# Altium PCB UROV_ESC_Mounts.PcbDoc
Units mm, origin at the board's own origin, x right, y up, seen from the top; angles counter-clockwise.
Board outline 99 x 99 mm, 2 copper layers (Top Layer, Bottom Layer); 24 components, 40 nets, 84 pads, 0 vias.
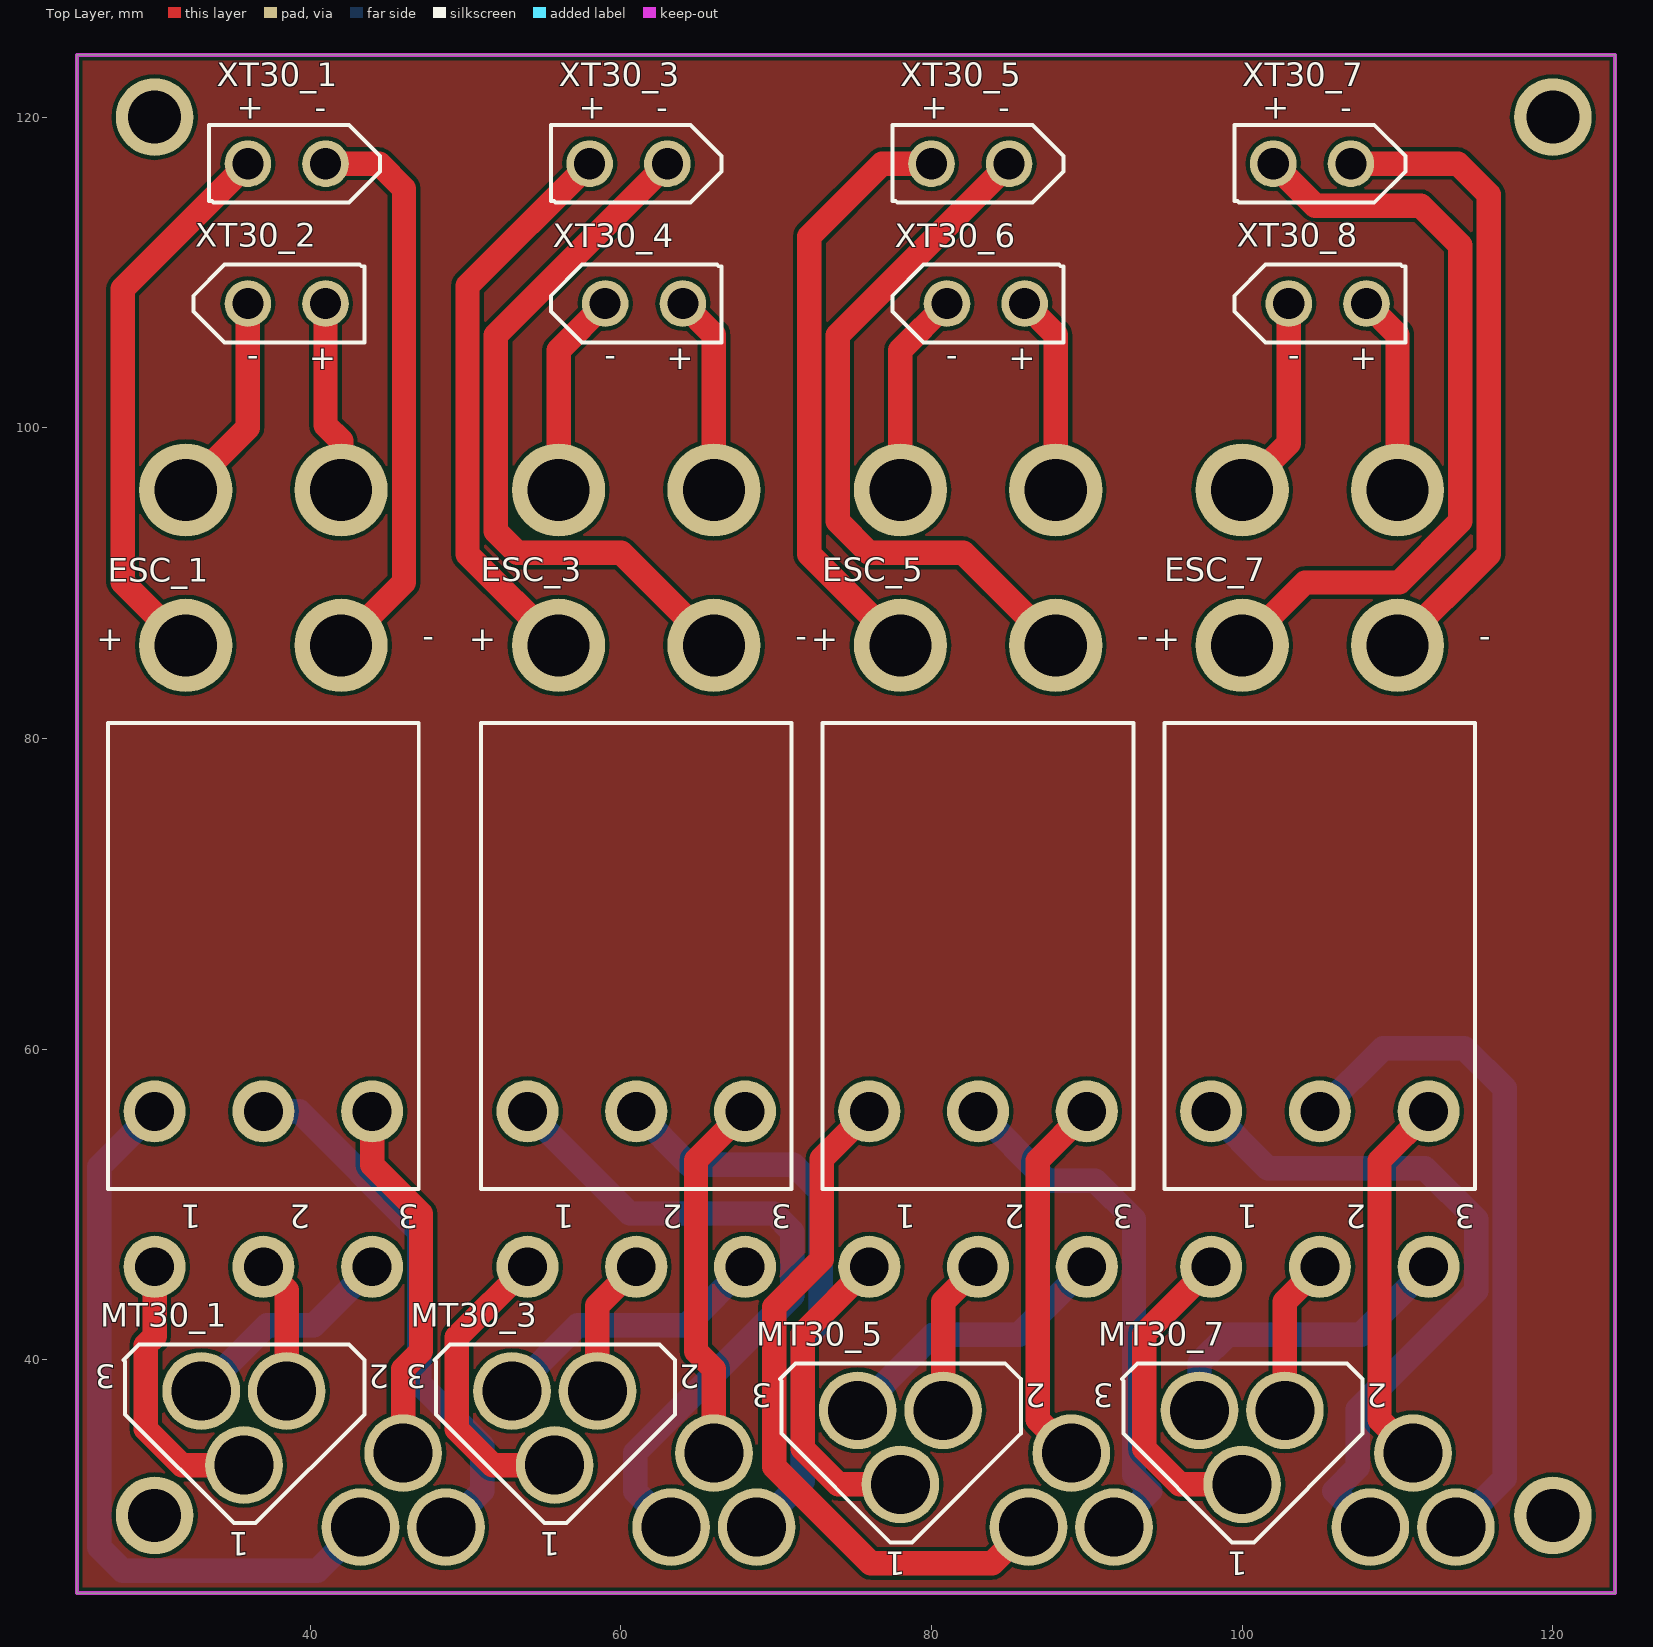
[diagram p0: Top Layer view]
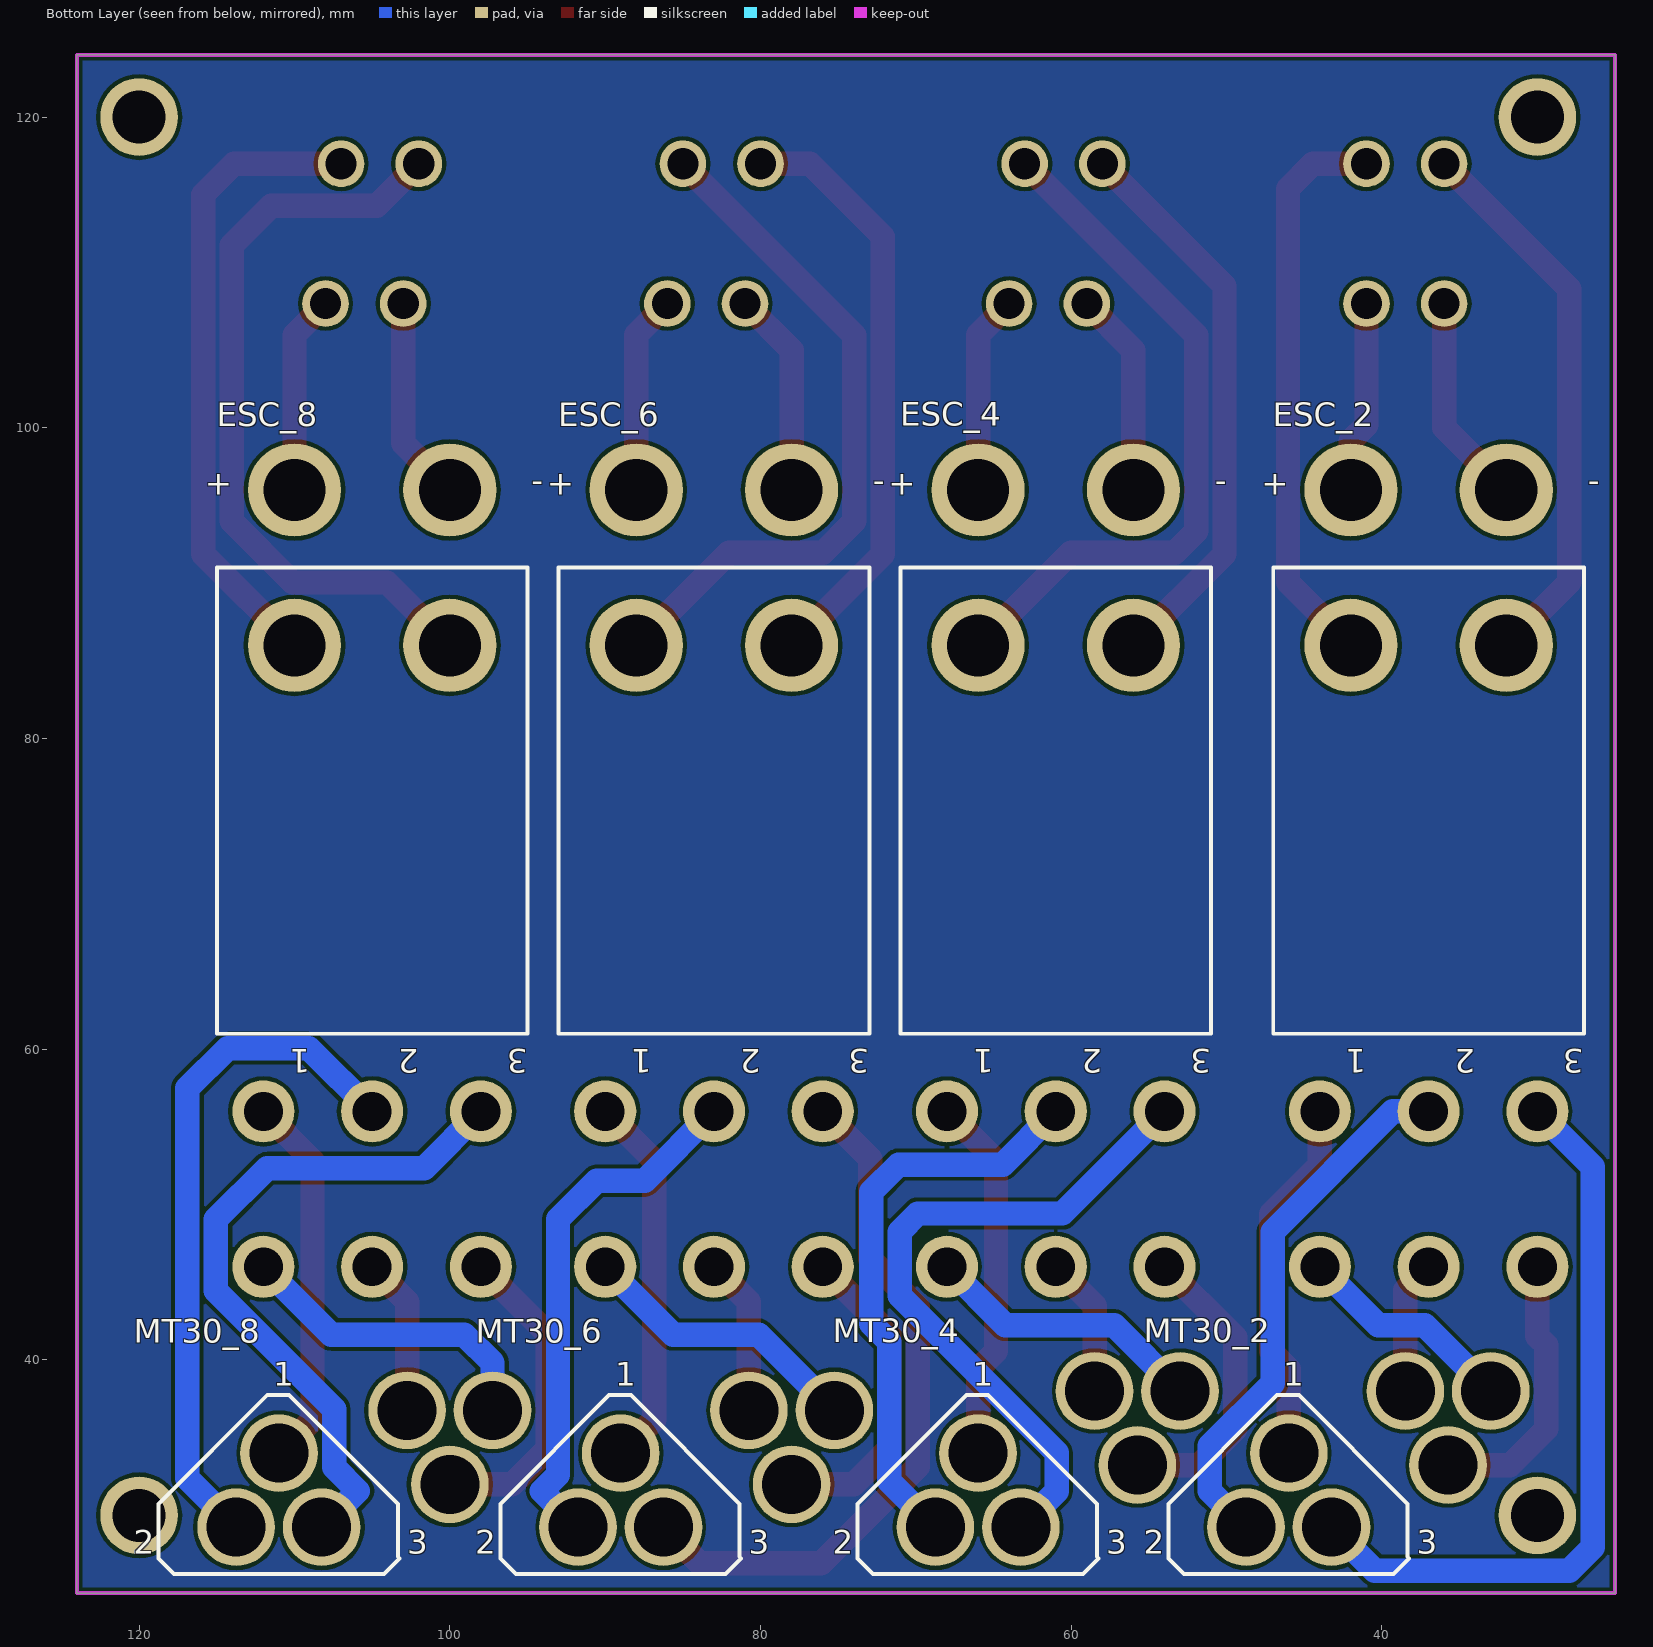
[diagram p1: Bottom Layer view, seen from below]

## Layer stack, top to bottom
Top Solder: solder mask 0.0102, Solder Resist, Dk 3.5
Top Layer: signal copper 0.0356
Dielectric 1: dielectric 0.32, FR-4, Dk 4.8
Bottom Layer: signal copper 0.0356
Bottom Solder: solder mask 0.0102, Solder Resist, Dk 3.5

## Board outline
124,25 124,124 25,124 25,25

## Design rules (kind name [scope] priority, off if disabled: settings)
Clearance [All] p1: gap=0.254 ignorepadtopadclearanceinfootprint=FALSE except(0: Arc-Hole Track-Hole SMDPad-Hole THPad-Hole Via-Hole Fill-Hole Poly-Hole Region-Hole Text-Hole)
PolygonConnect [All] p1: connectstyle=Relief reliefconductorwidth=0.254 reliefentries=4 polygonreliefangle="90 Angle" airgapwidth=0.254
RoomDefinition UROV_ESC_Mounts [InComponentClass('UROV_ESC_Mounts')] p1: confinementstyle=ConfineIn formatcopy=TRUE lockcomponents=FALSE outline 25,25 124,25 124,124 25,124
RoutingVias [All] p1: holewidth=0.711 width=1.27 viastyle="Through Hole" minholewidth=0.711 minwidth=1.27 maxholewidth=0.711 maxwidth=1.27
SolderMaskExpansion [All] p1: expansion=0.102
Width [All] p1: maxlimit=3 minlimit=1 preferedwidth=1.57
30 further rules are at their usual default settings.

## Components (designator, comment, footprint, x,y, rotation, side; value= is the part's Value field where it differs from the comment)
ESC_1 "ESC_Template" ESC_mounts 47,81 r180 top
ESC_2 "ESC_Template" ESC_mounts 27,91 r0 bottom
ESC_3 "ESC_Template" ESC_mounts 71,81 r180 top
ESC_4 "ESC_Template" ESC_mounts 51,91 r0 bottom
ESC_5 "ESC_Template" ESC_mounts 93,81 r180 top
ESC_6 "ESC_Template" ESC_mounts 73,91 r0 bottom
ESC_7 "ESC_Template" ESC_mounts 115,81 r180 top
ESC_8 "ESC_Template" ESC_mounts 95,91 r0 bottom
MT30_1 "MT60_3pin" MT60_3pin 38.5,38 r180 top
MT30_2 "MT60_3pin" MT60_3pin 48.75,29.237 r180 bottom
MT30_3 "MT60_3pin" MT60_3pin 58.5,38 r180 top
MT30_4 "MT60_3pin" MT60_3pin 68.75,29.237 r180 bottom
MT30_5 "MT60_3pin" MT60_3pin 80.75,36.763 r180 top
MT30_6 "MT60_3pin" MT60_3pin 91.75,29.237 r180 bottom
MT30_7 "MT60_3pin" MT60_3pin 102.75,36.763 r180 top
MT30_8 "MT60_3pin" MT60_3pin 113.75,29.237 r180 bottom
XT30_1 "XT30_2pin" XT30_2pin 36,117 r0 top
XT30_2 "XT30_2pin" XT30_2pin 41,108 r180 top
XT30_3 "XT30_2pin" XT30_2pin 58,117 r0 top
XT30_4 "XT30_2pin" XT30_2pin 64,108 r180 top
XT30_5 "XT30_2pin" XT30_2pin 80,117 r0 top
XT30_6 "XT30_2pin" XT30_2pin 86,108 r180 top
XT30_7 "XT30_2pin" XT30_2pin 102,117 r0 top
XT30_8 "XT30_2pin" XT30_2pin 108,108 r180 top

## Footprints (in the part's own frame and the unit in brackets; to place one, negate y for a bottom-side part, rotate by r counter-clockwise, add the part's x,y. Pads: shape width x height; smd on the part's side, far side on the other; paste and mask are expansions set on the pad)
ESC_mounts [mm]
  round 6 hole 4: 1(5,-5) 2(15,-5)
  round 4 hole 2.5: 3(3,35) 4(10,35) 5(17,35)
  silkscreen extent 0,0 20,30
MT60_3pin [mm]
  round 5 hole 3.8: 1(2.75,4.763) 2(0,0) 3(5.5,0)
  silkscreen extent -5,-3 10.5,8.5
XT30_2pin [mm]
  round 3 hole 2: +(0,0) -(5,0)
  silkscreen extent -2.5,-2.5 8.5,2.5

## Free pads (board coordinates)
  round 5 hole 3.4: 48(30,30) 48(30,120) 48(120,30) 48(120,120)

## Nets (pads, with @x,y where several pads share a name; then routed paths per layer and width w, separated by ;. In a path a pad name is that pad's centre, name@x,y a point inside that pad or via, vN(x,y) a via of type N, cw(c..) or ccw(c..) an arc to the next point about the centre after c; other vN are vias at no path point)
NetESC_1_1: ESC_1.1 XT30_1.- | length 36.8
  Top Layer w1.57: XT30_1.- 44.446,117 46.05,115.395 46.05,90.05 ESC_1.1
NetESC_1_2: ESC_1.2 XT30_1.+ | length 36
  Top Layer w1.57: ESC_1.2 27.94,90.06 27.94,108.94 XT30_1.+
NetESC_1_3: ESC_1.3 MT30_1.3 | length 14.3
  Bottom Layer w1.57: MT30_1.3 37.24,42.24 40.24,42.24 ESC_1.3
NetESC_1_4: ESC_1.4 MT30_1.2 | length 8.6
  Top Layer w1.57: ESC_1.4 38.5,44.5 MT30_1.2
NetESC_1_5: ESC_1.5 MT30_1.1 | length 17.9
  Top Layer w1.57: ESC_1.5 30,41.529 29.439,40.968 29.439,35.56 31.762,33.237 MT30_1.1
NetESC_2_1: ESC_2.1 XT30_2.- | length 13.7
  Top Layer w1.57: ESC_2.1 36,100 XT30_2.-
NetESC_2_2: ESC_2.2 XT30_2.+ | length 12.4
  Top Layer w1.57: XT30_2.+ 41,100.166 42,99.166 ESC_2.2
NetESC_2_3: ESC_2.3 MT30_2.3 | length 48.1
  Bottom Layer w1.57: ESC_2.3 26.441,52.441 26.441,27.94 27.94,26.441 40.454,26.441 MT30_2.3
NetESC_2_4: ESC_2.4 MT30_2.2 | length 34.9
  Bottom Layer w1.57: ESC_2.4 39.301,56 47.041,48.26 47.041,38.515 51.079,34.476 51.079,31.566 MT30_2.2
NetESC_2_5: ESC_2.5 MT30_2.1 | length 23.8
  Top Layer w1.57: ESC_2.5 44,52.553 47.142,49.41 47.142,40.564 46,39.421 MT30_2.1
NetESC_3_1: ESC_3.1 XT30_3.- | length 45.3
  Top Layer w1.57: XT30_3.- 51.961,105.961 51.961,93.34 53.34,91.961 60.039,91.961 ESC_3.1
NetESC_3_2: ESC_3.2 XT30_3.+ | length 36.7
  Top Layer w1.57: ESC_3.2 50.137,91.863 50.137,109.137 XT30_3.+
NetESC_3_3: ESC_3.3 MT30_3.3 | length 18.3
  Bottom Layer w1.57: MT30_3.3 57.24,42.24 64.24,42.24 ESC_3.3
NetESC_3_4: ESC_3.4 MT30_3.2 | length 9
  Top Layer w1.57: MT30_3.2 58.5,43.5 ESC_3.4
NetESC_3_5: ESC_3.5 MT30_3.1 | length 19.6
  Top Layer w1.57: ESC_3.5 49.454,41.454 49.454,35.551 51.768,33.237 MT30_3.1
NetESC_4_1: ESC_4.1 XT30_4.- | length 13.2
  Top Layer w1.57: ESC_4.1 56,105 XT30_4.-
NetESC_4_2: ESC_4.2 XT30_4.+ | length 12.8
  Top Layer w1.57: XT30_4.+ 66,106 ESC_4.2
NetESC_4_3: ESC_4.3 MT30_4.3 | length 44.4
  Bottom Layer w1.57: ESC_4.3 60.572,49.428 69.875,49.428 71.044,48.26 71.044,44.145 60.935,34.036 60.935,31.552 MT30_4.3
NetESC_4_4: ESC_4.4 MT30_4.2 | length 37.3
  Bottom Layer w1.57: ESC_4.4 64.422,52.578 71.12,52.578 72.873,50.825 72.873,42.342 71.704,41.173 71.704,32.191 MT30_4.2
NetESC_4_5: ESC_4.5 MT30_4.1 | length 23.8
  Top Layer w1.57: MT30_4.1 66,39.421 64.846,40.575 64.846,52.846 ESC_4.5
NetESC_5_1: ESC_5.1 XT30_5.- | length 44.9
  Top Layer w1.57: XT30_5.- 73.961,105.961 73.961,93.98 75.98,91.961 82.039,91.961 ESC_5.1
NetESC_5_2: ESC_5.2 XT30_5.+ | length 38.5
  Top Layer w1.57: ESC_5.2 72.137,91.863 72.137,112.317 76.82,117 XT30_5.+
NetESC_5_3: ESC_5.3 MT30_5.3 | length 18.6
  Bottom Layer w1.57: MT30_5.3 80.118,41.631 85.631,41.631 ESC_5.3
NetESC_5_4: ESC_5.4 MT30_5.2 | length 10.2
  Top Layer w1.57: MT30_5.2 80.75,43.75 ESC_5.4
NetESC_5_5: ESC_5.5 MT30_5.1 | length 20.7
  Top Layer w1.57: ESC_5.5 71.704,41.704 71.704,34.29 73.994,32 MT30_5.1
NetESC_6_1: ESC_6.1 XT30_6.- | length 13.2
  Top Layer w1.57: ESC_6.1 78,105 XT30_6.-
NetESC_6_2: ESC_6.2 XT30_6.+ | length 12.8
  Top Layer w1.57: XT30_6.+ 88,106 ESC_6.2
NetESC_6_3: ESC_6.3 MT30_6.3 | length 45.3
  Top Layer w1.57: ESC_6.3 72.949,52.949 72.949,46.482 69.875,43.409 69.875,33.117 76.083,26.909 83.922,26.909 MT30_6.3
NetESC_6_4: ESC_6.4 MT30_6.2 | length 34.1
  Bottom Layer w1.57: ESC_6.4 87.463,51.537 90.551,51.537 93.04,49.047 93.04,32.61 94.082,31.569 MT30_6.2
NetESC_6_5: ESC_6.5 MT30_6.1 | length 24.2
  Top Layer w1.57: MT30_6.1 86.843,36.157 86.843,52.843 ESC_6.5
NetESC_7_1: ESC_7.1 XT30_7.- | length 41.1
  Top Layer w1.57: XT30_7.- 113.894,117 115.875,115.019 115.875,91.875 ESC_7.1
NetESC_7_2: ESC_7.2 XT30_7.+ | length 49.3
  Top Layer w1.57: ESC_7.2 104.043,90.043 110.109,90.043 114.046,93.98 114.046,111.76 111.506,114.3 104.7,114.3 XT30_7.+
NetESC_7_3: ESC_7.3 MT30_7.3 | length 20.4
  Bottom Layer w1.57: MT30_7.3 97.25,39.821 99.06,41.631 107.631,41.631 ESC_7.3
NetESC_7_4: ESC_7.4 MT30_7.2 | length 10.2
  Top Layer w1.57: MT30_7.2 102.75,43.75 ESC_7.4
NetESC_7_5: ESC_7.5 MT30_7.1 | length 20.7
  Top Layer w1.57: ESC_7.5 93.701,41.701 93.701,34.29 95.991,32 MT30_7.1
NetESC_8_1: ESC_8.1 XT30_8.- | length 13.2
  Top Layer w1.57: ESC_8.1 103,99 XT30_8.-
NetESC_8_2: ESC_8.2 XT30_8.+ | length 12.8
  Top Layer w1.57: XT30_8.+ 110,106 ESC_8.2
NetESC_8_3: ESC_8.3 MT30_8.3 | length 44.5
  Bottom Layer w1.57: ESC_8.3 101.651,52.349 111.76,52.349 115.062,49.047 115.062,44.45 107.442,36.83 107.442,33.093 105.918,31.569 MT30_8.3
NetESC_8_4: ESC_8.4 MT30_8.2 | length 44.2
  Bottom Layer w1.57: ESC_8.4 109.071,60.071 114.3,60.071 116.891,57.48 116.891,32.378 MT30_8.2
NetESC_8_5: ESC_8.5 MT30_8.1 | length 24.2
  Top Layer w1.57: MT30_8.1 108.839,36.161 108.839,52.839 ESC_8.5

## Polygon pours and split planes (outlines as drawn)
no net on Top Layer "Top Layer-No Net" (solid, pour order 2): 124,25 124,124 25,124 25,25
no net on Bottom Layer "Bot Layer-No Net" (solid, pour order 3): 124,25 124,124 25,124 25,25

## Keep-outs
Keep-Out Layer:
  the board outline again, w0.254

## Text inside footprints (layer, text, board x,y; h text height)
ESC_1: Top Overlay "+" at 28,87 h1.52 r180; Top Overlay "-" at 48,87 h1.52 r180; Top Overlay "1" at 33,50 h1.52 r180; Top Overlay "2" at 40,50 h1.52 r180; Top Overlay "3" at 47,50 h1.52 r180
ESC_2: Bottom Overlay "+" at 46,97 h1.52 r180; Bottom Overlay "-" at 26,97 h1.52 r180; Bottom Overlay "1" at 41,60 h1.52 r180; Bottom Overlay "2" at 34,60 h1.52 r180; Bottom Overlay "3" at 27,60 h1.52 r180
ESC_3: Top Overlay "+" at 52,87 h1.52 r180; Top Overlay "-" at 72,87 h1.52 r180; Top Overlay "1" at 57,50 h1.52 r180; Top Overlay "2" at 64,50 h1.52 r180; Top Overlay "3" at 71,50 h1.52 r180
ESC_4: Bottom Overlay "+" at 70,97 h1.52 r180; Bottom Overlay "-" at 50,97 h1.52 r180; Bottom Overlay "1" at 65,60 h1.52 r180; Bottom Overlay "2" at 58,60 h1.52 r180; Bottom Overlay "3" at 51,60 h1.52 r180
ESC_5: Top Overlay "+" at 74,87 h1.52 r180; Top Overlay "-" at 94,87 h1.52 r180; Top Overlay "1" at 79,50 h1.52 r180; Top Overlay "2" at 86,50 h1.52 r180; Top Overlay "3" at 93,50 h1.52 r180
ESC_6: Bottom Overlay "+" at 92,97 h1.52 r180; Bottom Overlay "-" at 72,97 h1.52 r180; Bottom Overlay "1" at 87,60 h1.52 r180; Bottom Overlay "2" at 80,60 h1.52 r180; Bottom Overlay "3" at 73,60 h1.52 r180
ESC_7: Top Overlay "+" at 96,87 h1.52 r180; Top Overlay "-" at 116,87 h1.52 r180; Top Overlay "1" at 101,50 h1.52 r180; Top Overlay "2" at 108,50 h1.52 r180; Top Overlay "3" at 115,50 h1.52 r180
ESC_8: Bottom Overlay "+" at 114,97 h1.52 r180; Bottom Overlay "-" at 94,97 h1.52 r180; Bottom Overlay "1" at 109,60 h1.52 r180; Bottom Overlay "2" at 102,60 h1.52 r180; Bottom Overlay "3" at 95,60 h1.52 r180
MT30_1: Top Overlay "1" at 36.1,28.9 h1.52 r180; Top Overlay "3" at 27.5,39.7 h1.52 r180; Top Overlay "2" at 45.1,39.7 h1.52 r180
MT30_2: Bottom Overlay "1" at 46.35,38.337 h1.52; Bottom Overlay "3" at 37.75,27.537 h1.52; Bottom Overlay "2" at 55.35,27.537 h1.52
MT30_3: Top Overlay "1" at 56.1,28.9 h1.52 r180; Top Overlay "3" at 47.5,39.7 h1.52 r180; Top Overlay "2" at 65.1,39.7 h1.52 r180
MT30_4: Bottom Overlay "1" at 66.35,38.337 h1.52; Bottom Overlay "3" at 57.75,27.537 h1.52; Bottom Overlay "2" at 75.35,27.537 h1.52
MT30_5: Top Overlay "1" at 78.35,27.663 h1.52 r180; Top Overlay "3" at 69.75,38.463 h1.52 r180; Top Overlay "2" at 87.35,38.463 h1.52 r180
MT30_6: Bottom Overlay "1" at 89.35,38.337 h1.52; Bottom Overlay "3" at 80.75,27.537 h1.52; Bottom Overlay "2" at 98.35,27.537 h1.52
MT30_7: Top Overlay "1" at 100.35,27.663 h1.52 r180; Top Overlay "3" at 91.75,38.463 h1.52 r180; Top Overlay "2" at 109.35,38.463 h1.52 r180
MT30_8: Bottom Overlay "1" at 111.35,38.337 h1.52; Bottom Overlay "3" at 102.75,27.537 h1.52; Bottom Overlay "2" at 120.35,27.537 h1.52
XT30_1: Top Overlay "-" at 40.3,119.9 h1.52; Top Overlay "+" at 35.3,119.9 h1.52
XT30_2: Top Overlay "-" at 36.7,105.1 h1.52 r180; Top Overlay "+" at 41.7,105.1 h1.52 r180
XT30_3: Top Overlay "-" at 62.3,119.9 h1.52; Top Overlay "+" at 57.3,119.9 h1.52
XT30_4: Top Overlay "-" at 59.7,105.1 h1.52 r180; Top Overlay "+" at 64.7,105.1 h1.52 r180
XT30_5: Top Overlay "-" at 84.3,119.9 h1.52; Top Overlay "+" at 79.3,119.9 h1.52
XT30_6: Top Overlay "-" at 81.7,105.1 h1.52 r180; Top Overlay "+" at 86.7,105.1 h1.52 r180
XT30_7: Top Overlay "-" at 106.3,119.9 h1.52; Top Overlay "+" at 101.3,119.9 h1.52
XT30_8: Top Overlay "-" at 103.7,105.1 h1.52 r180; Top Overlay "+" at 108.7,105.1 h1.52 r180